# EAGLE board amp (EAGLE 6.4)
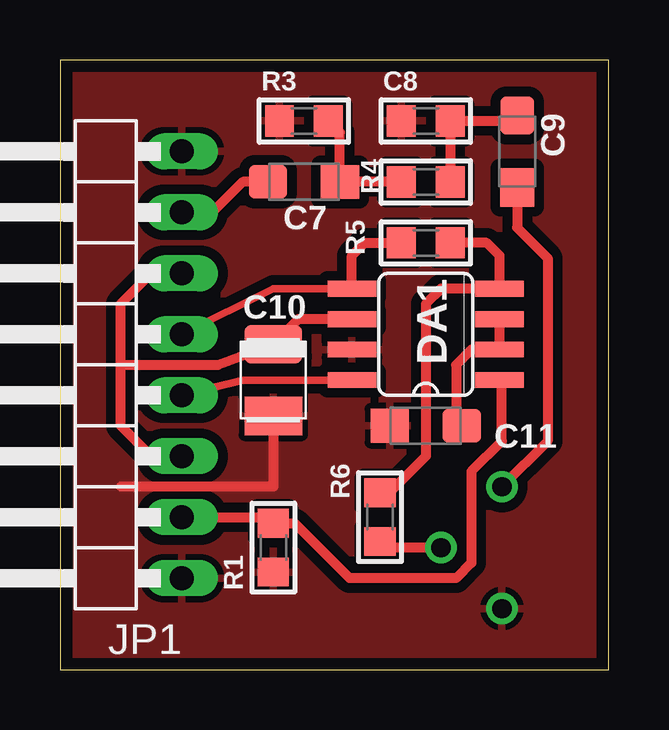
[diagram p0: board, top side]
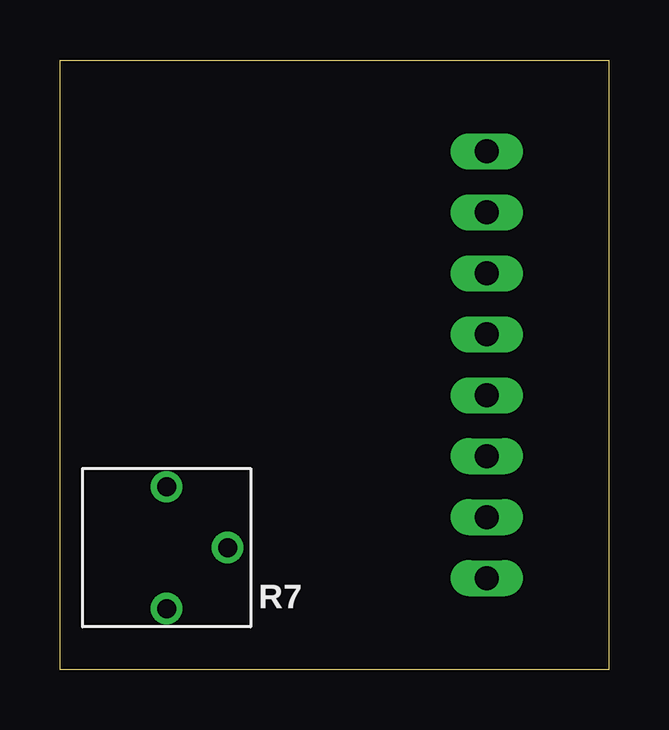
[diagram p1: board, bottom side, seen from below]

Size 22.86 x 25.4 mm. Coordinates in mm from the lower left corner, seen from the top.
Outline: 0,0 22.86,0 22.86,25.4 0,25.4 0,0
Copper layers (1*16): Top 0.035mm / dielectric 1.5mm / Bottom 0.035mm
Design rules "default *": minimum track width 10mil, minimum drill 24mil, track to track 8mil, track to pad 8mil, pad to pad 8mil, via to via 8mil, smd to smd 8mil, copper to edge 0.5mm, drill to drill 8mil, minimum pad ring 10mil, minimum via ring 8mil, stop-mask expansion 4mil, vias tented up to drill 0mil, thermal gap 10mil

## Footprints (pad centres in the part's own frame; a part is rotated, then mirrored left to right if it is on the bottom)
SMC_A = smd 1.6 x 1.4: + -1.5,0; - 1.5,0
C0805 = smd 1.2 x 1.3: 1 -1.016,0; 2 1.016,0
SMC_B = smd 1.6 x 2.4: + -1.5,0; - 1.5,0
SO08 = smd 0.66 x 2.032: 1 -1.905,-3.073; 2 -0.635,-3.073; 3 0.635,-3.073; 4 1.905,-3.073; 5 1.905,3.073; 6 0.635,3.073; 7 -0.635,3.073; 8 -1.905,3.073
1X08/90 = drill 1 long: 1 -8.89,-3.81; 2 -6.35,-3.81; 3 -3.81,-3.81; 4 -1.27,-3.81; 5 1.27,-3.81; 6 3.81,-3.81; 7 6.35,-3.81; 8 8.89,-3.81
R0805 = smd 1.2 x 1.3: 1 -1.016,0; 2 1.016,0
RTRIM-3362P = drill 0.8: 1 -2.54,0; 2 0,2.54; 3 2.54,0

## Placement (x,y rotation side)
C7  1uF  [SMC_A]  10.16,20.32 0 top
C8  10n  [C0805]  15.24,22.86 180 top
C9  10uF  [SMC_A]  19.05,21.59 270 top
C10  1uF  [SMC_B]  8.89,12.06 270 top
C11  1uF  [SMC_A]  15.24,10.16 180 top
DA1  LM4871MX  [SO08]  15.24,13.97 90 top
JP1  [1X08/90]  1.27,12.7 90 top
R1  22K  [R0805]  8.89,5.08 90 top
R3  22K  [R0805]  10.16,22.86 0 top
R4  22K  [R0805]  15.24,20.32 0 top
R5  20K  [R0805]  15.24,17.78 180 top
R6  20K  [R0805]  13.34,6.35 90 top
R7  100K  [RTRIM-3362P]  18.41,5.08 270 bottom

## Library data of the parts
C7-C11 R1 R3-R6 = rc-master-smd
DA1 = power_amp
JP1 = pinhead-fixdrills
R7 = lcd-char

## Nets
GND: C8.2 C10.- C11.- DA1.7 JP1.1 JP1.8 R1.1 R3.1 R7.3
N$1: DA1.1 JP1.2 R1.2
N$3: C10.+ DA1.6 JP1.3 JP1.6
N$4: DA1.8 JP1.4
N$5: C7.+ JP1.7
N$7: C7.- R3.2 R4.1
N$8: C8.1 C9.+ R4.2
N$10: DA1.4 R5.1 R6.2
N$12: C9.- R7.1
N$13: R6.1 R7.2
N$14: C11.+ DA1.2 DA1.3
N$15: DA1.5 JP1.5 R5.2

## Tracks (layer width: path | path; a pad name or v marks a point on that pad's centre or on a via)
GND
  Top 0.406: C10.- 8.89,7.62 2.54,7.62
  pour Top (isolate 0.406): -1.27,26.67 25.4,26.67 25.4,-1.27 -1.27,-1.27
N$1
  Top 0.406: JP1.2 8.64,6.35 R1.2 9.78,6.1 12.06,3.81 16.51,3.81 17.14,4.45 17.14,8.26 18.41,9.53 18.41,11.96 DA1.1
N$3
  Top 0.406: DA1.6 9.93,14.61 C10.+ 6.58,12.7 2.54,12.7 | JP1.6 3.81,16.51 2.54,15.24 2.54,12.7 | JP1.3 3.81,8.89 2.54,10.16 2.54,12.7
N$4
  Top 0.305: DA1.8 7.62,12.06 JP1.4
N$5
  Top 0.406: C7.+ 7.62,20.32 6.35,19.05 JP1.7
N$7
  Top 0.406: R4.1 C7.- 11.66,22.38 R3.2
N$8
  Top 0.406: R4.2 C8.1 18.82,22.86 C9.+
N$10
  Top 0.406: R5.1 17.78,17.78 18.31,17.25 DA1.4 15.88,15.88 15.24,15.24 15.24,8.89 13.72,7.37 R6.2
N$12
  Top 0.406: C9.- 19.05,18.41 20.32,17.14 20.32,9.53 R7.1
N$13
  Top 0.406: R7.2 13.59,5.08 R6.1
N$14
  Top 0.406: DA1.3 DA1.2 17.14,13.34 16.51,12.7 16.51,10.39 C11.+
N$15
  Top 0.305: DA1.5 8.89,15.88 JP1.5
  Top 0.406: DA1.5 12.17,17.25 12.7,17.78 R5.2